# Altium PCB Camera.PcbDoc (part 1 of 2)
Units mm, origin at the board's own origin, x right, y up, seen from the top; angles counter-clockwise.
Board outline 24 x 24 mm, 8 copper layers (Top Layer, L2 - GND, L3 - SIG, L4 - PWR, L5 - GND, L6 - SIG, L7 - GND, Bottom Layer), stack 1.6 mm thick; 103 components, 49 nets, 348 pads, 185 vias.
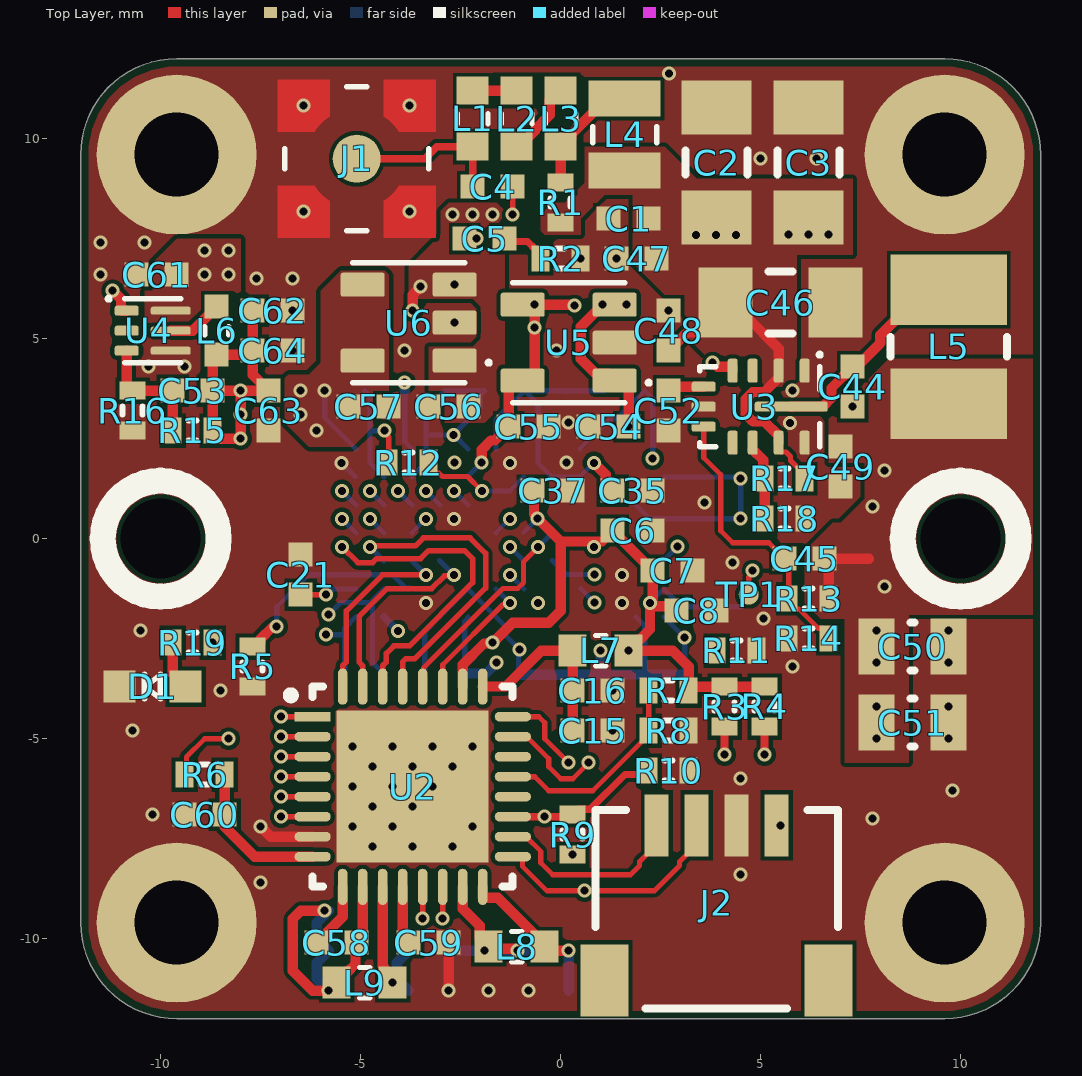
[diagram p0: Top Layer view]
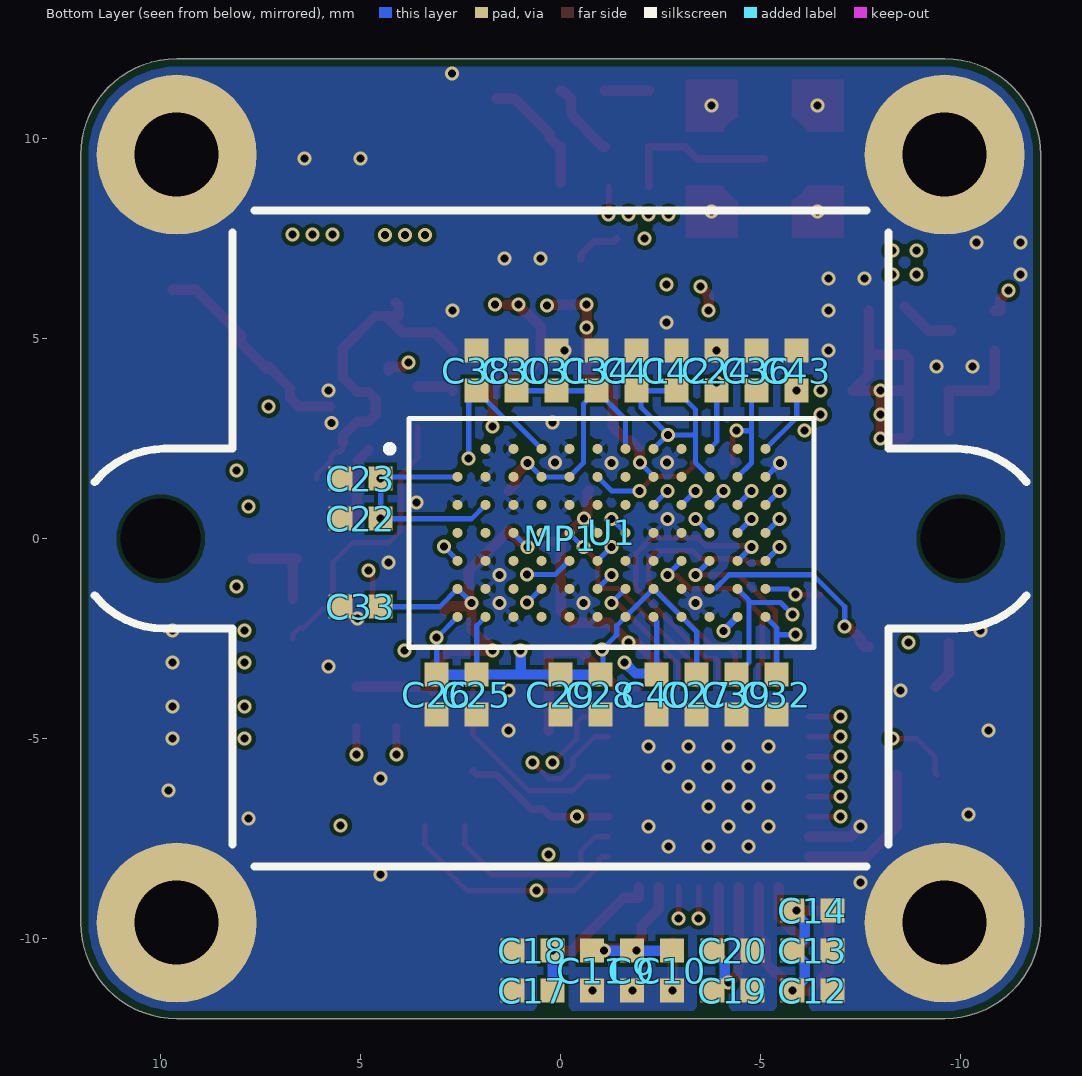
[diagram p1: Bottom Layer view, seen from below]
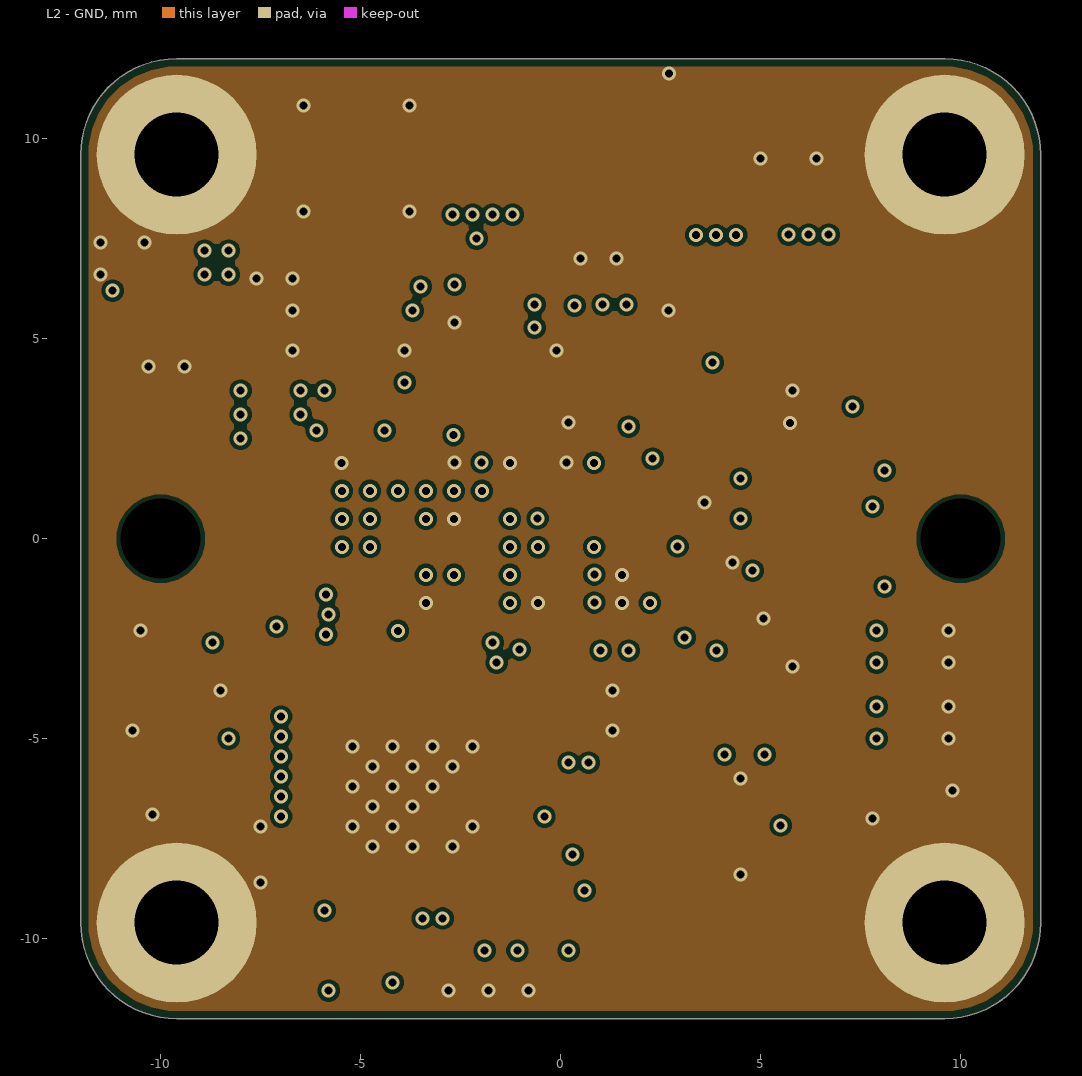
[diagram p2: L2 - GND]
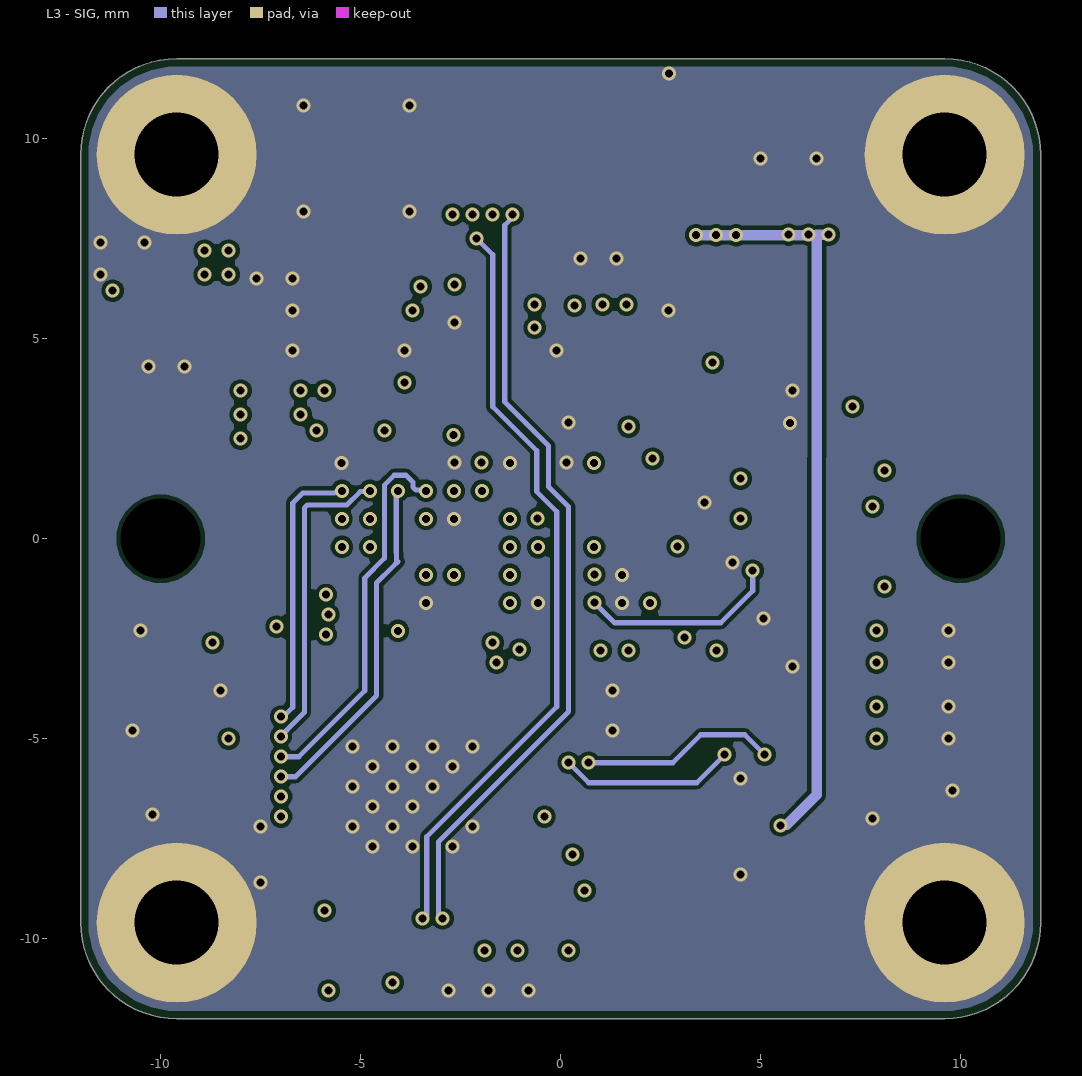
[diagram p3: L3 - SIG]
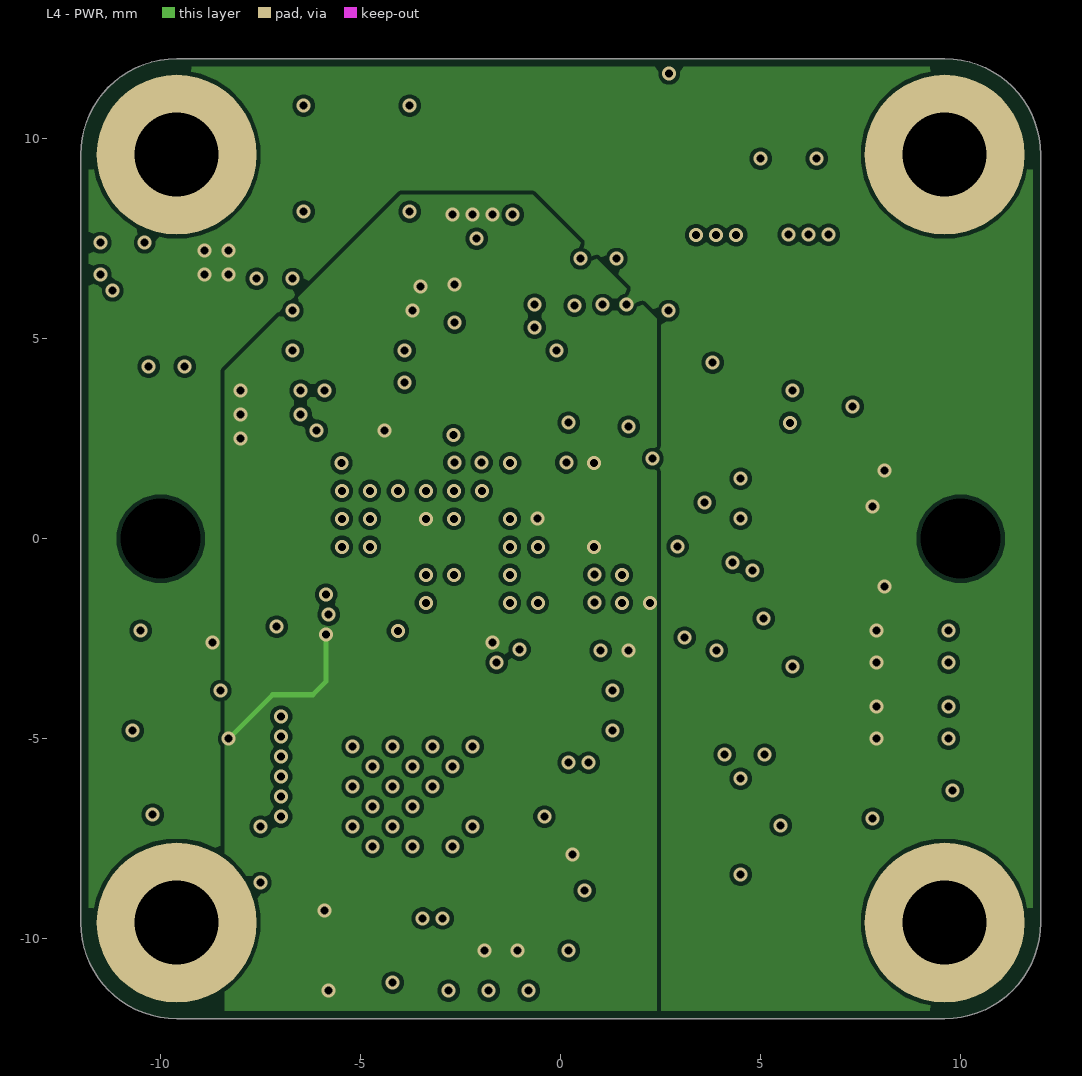
[diagram p4: L4 - PWR]
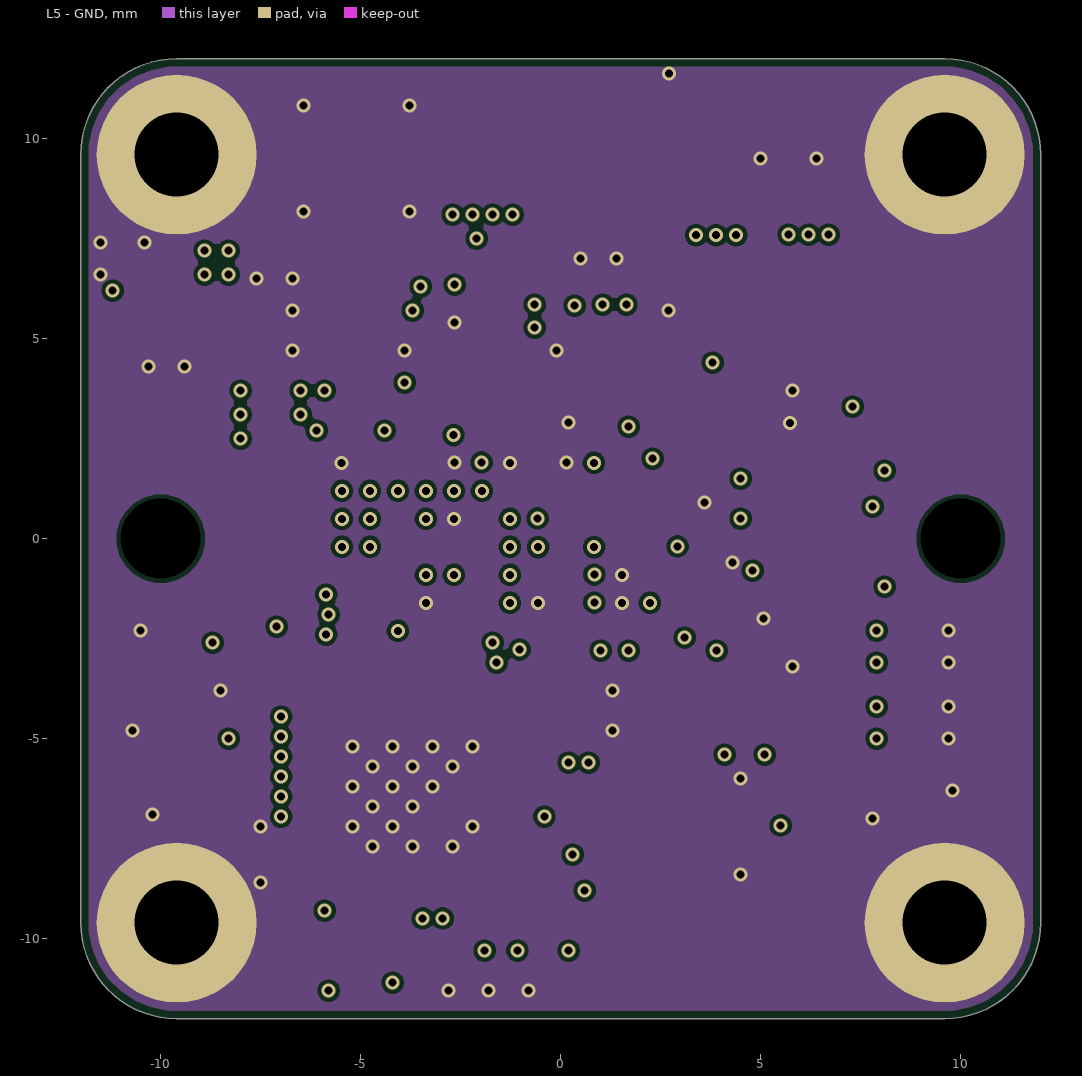
[diagram p5: L5 - GND]
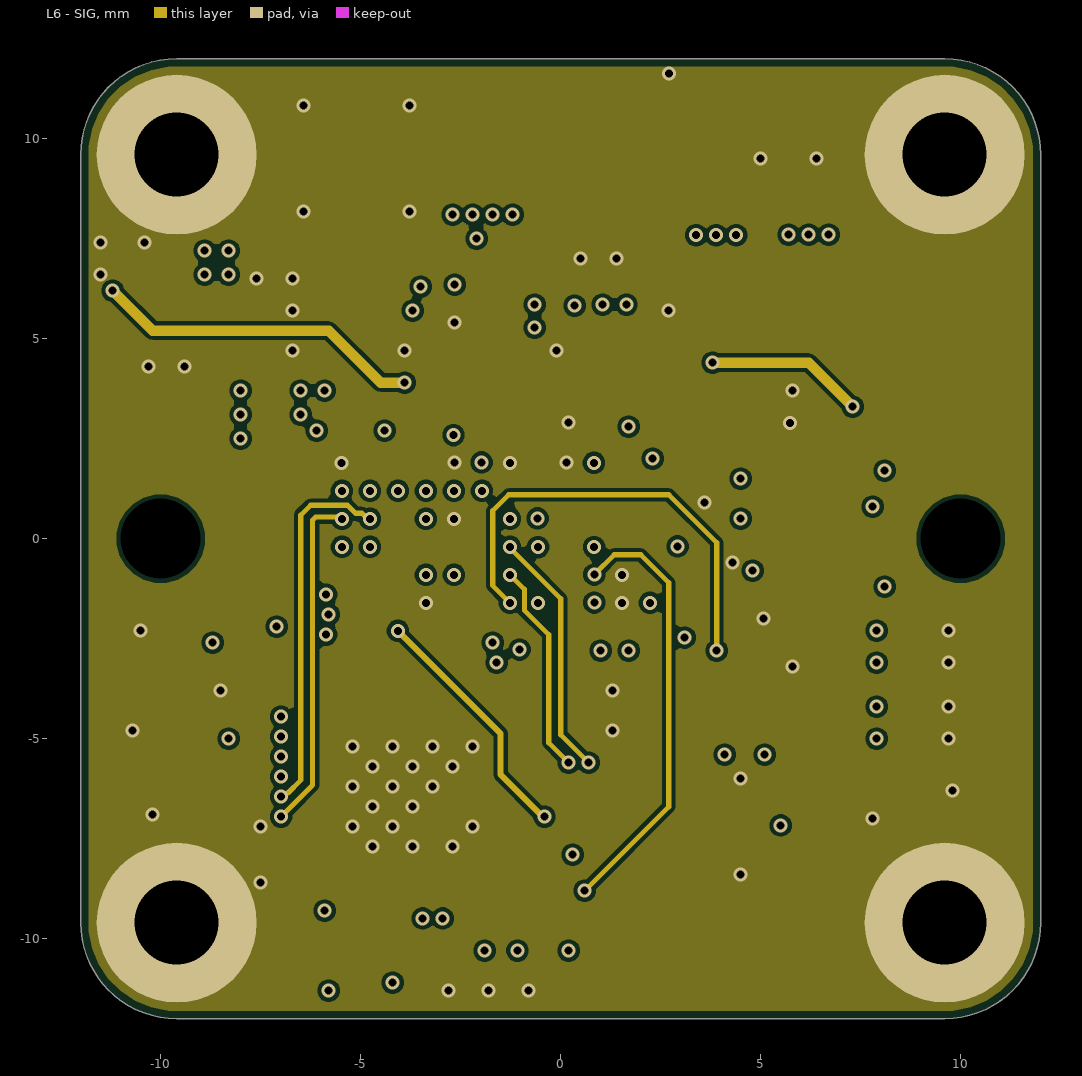
[diagram p6: L6 - SIG]
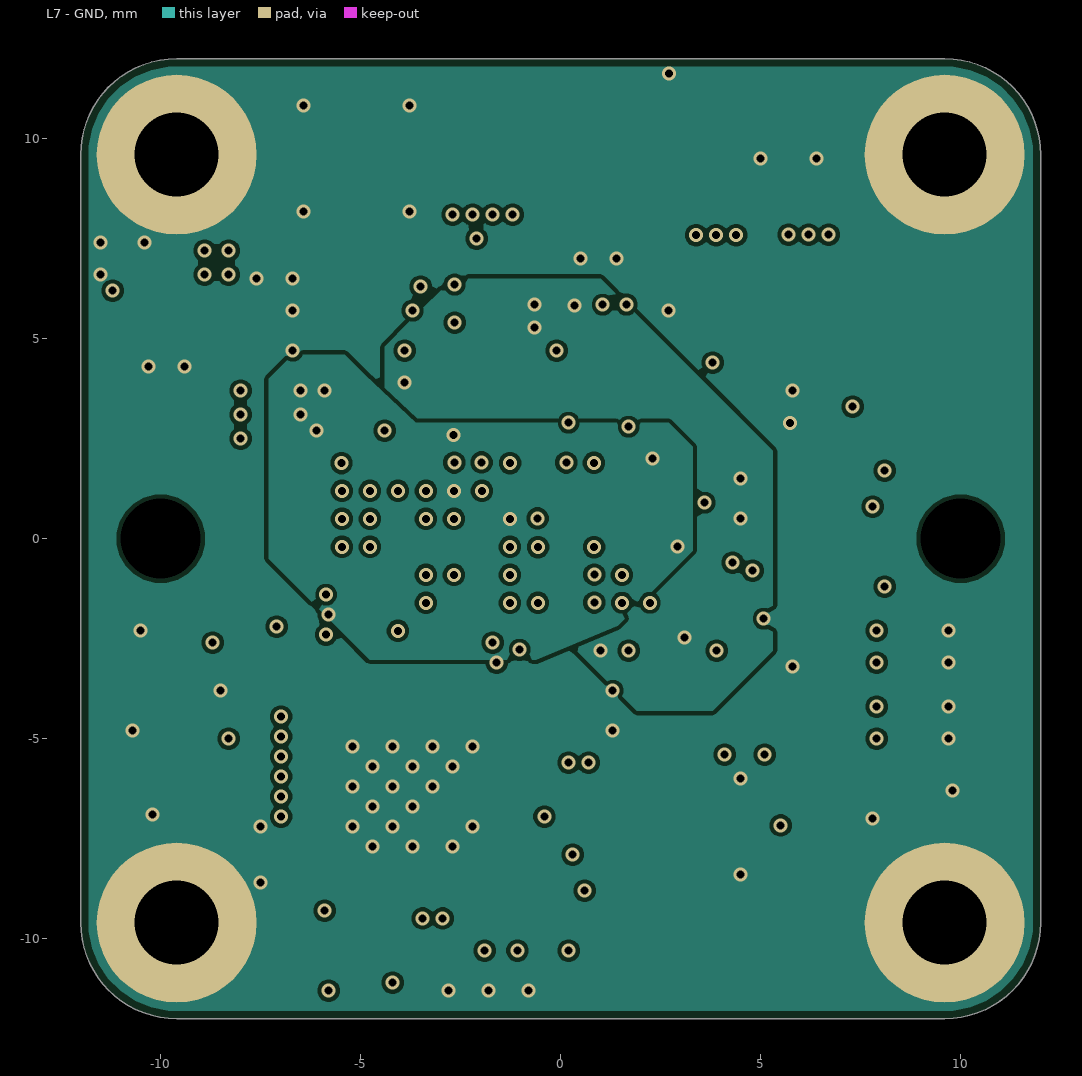
[diagram p7: L7 - GND]
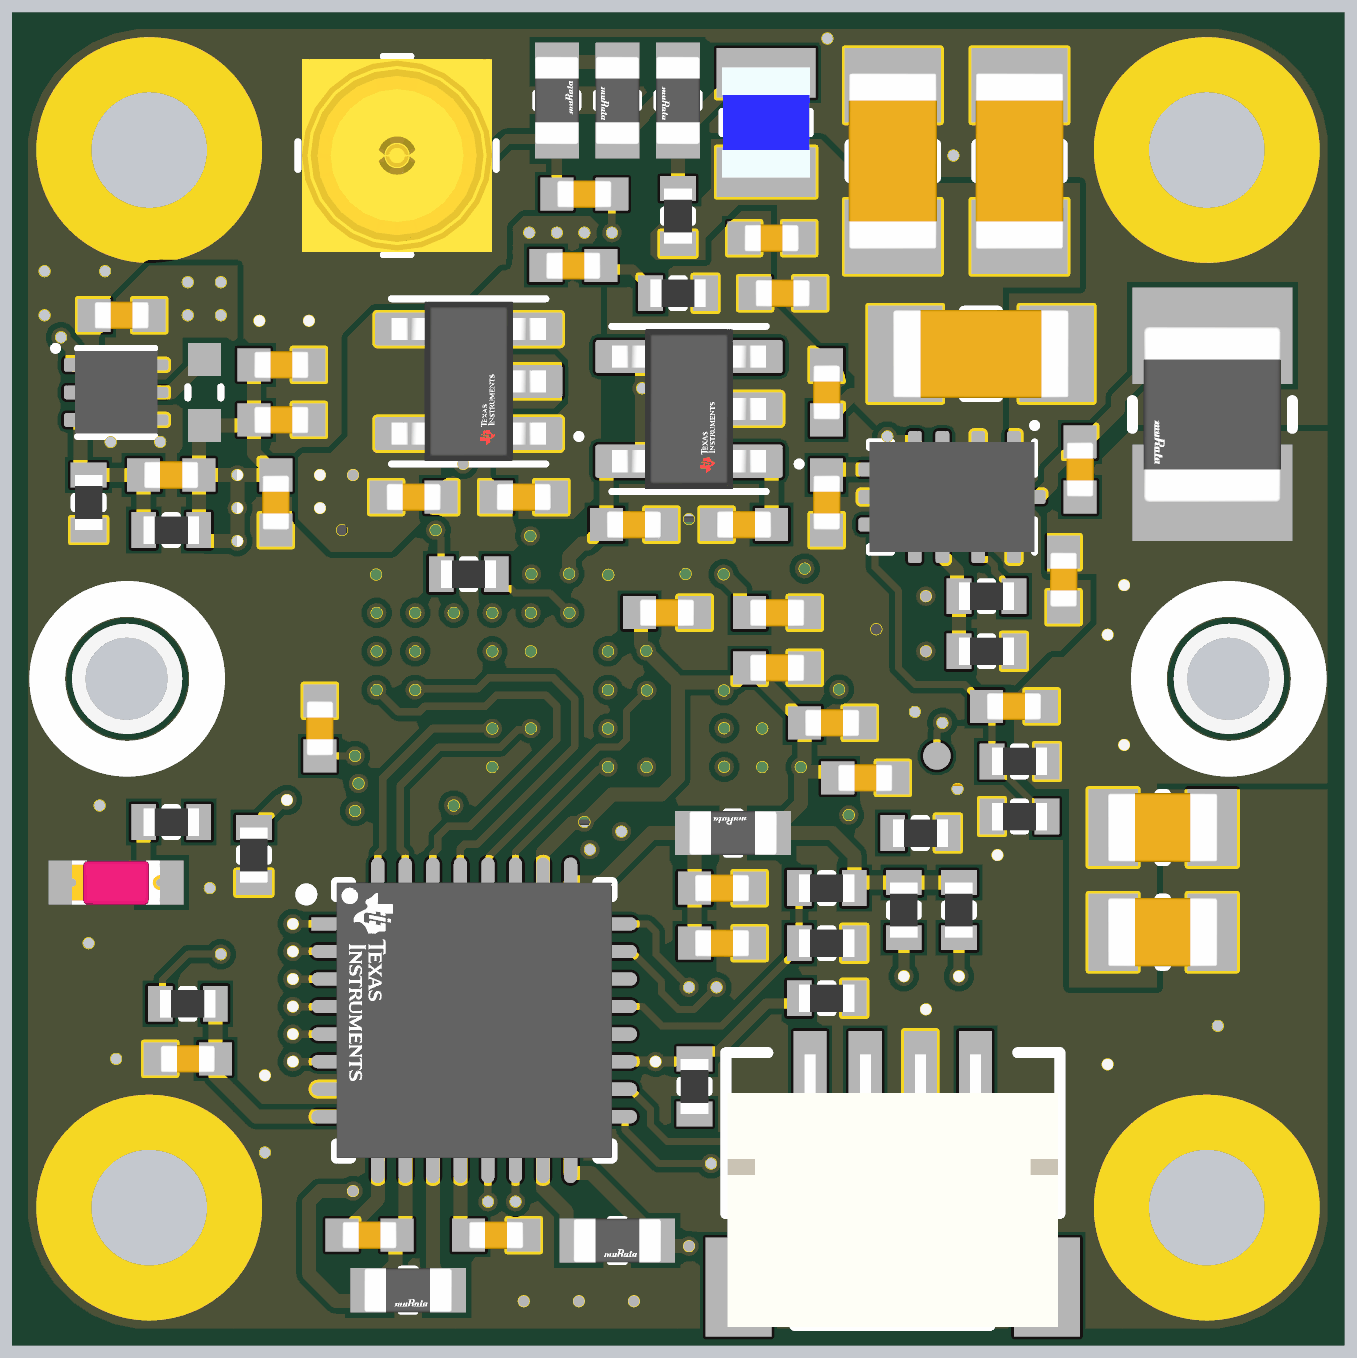
[diagram p9: 3D render of the assembled board from above, using the file's embedded part models]
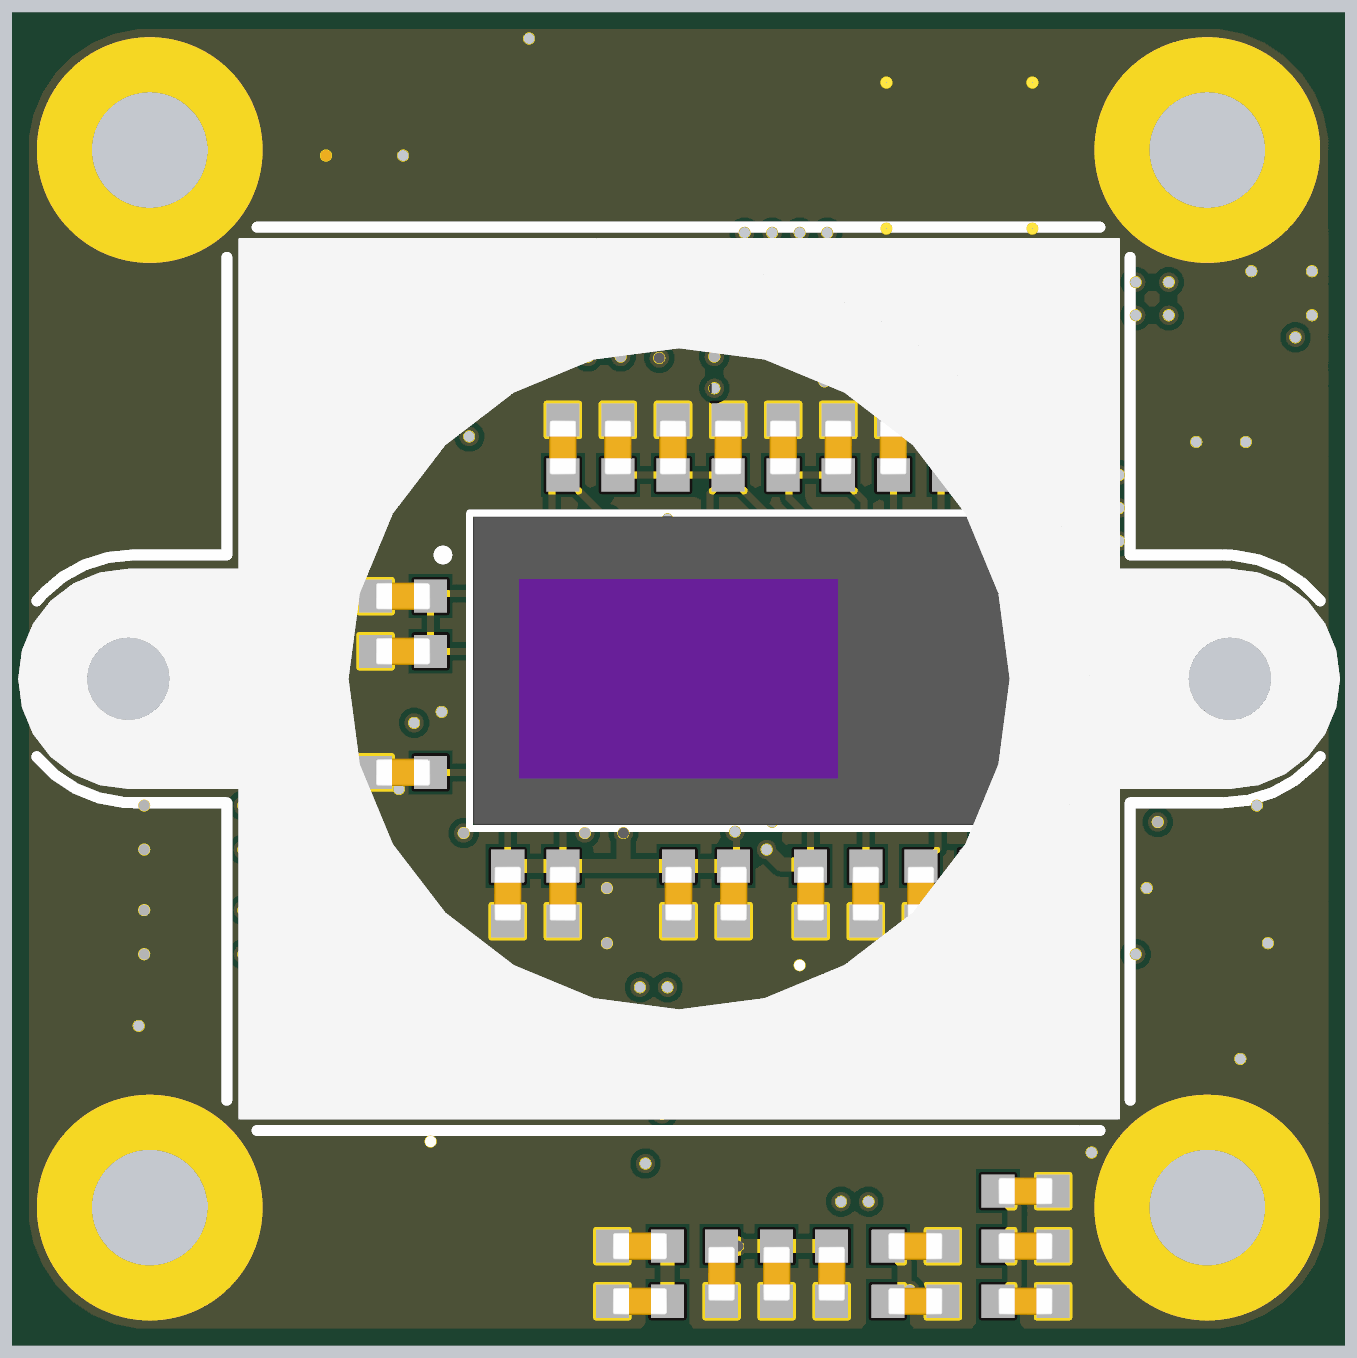
[diagram p10: 3D render of the assembled board from below, using the file's embedded part models]

## Layer stack, top to bottom
Top Solder: solder mask 0.015, SM-001, Dk 4
Top Layer: signal copper 0.035
Dielectric 1: prepreg 0.1164, PP-006, Dk 4.16
L2 - GND: signal copper 0.0152
Dielectric 2: core 0.3, PP-006, Dk 4.2
L3 - SIG: signal copper 0.0152
Dielectric 3: prepreg 0.0764, PP-006, Dk 3.91
Dielectric 4: prepreg 0.0764, PP-006, Dk 3.91
L4 - PWR: signal copper 0.0152
Dielectric 5: core 0.3, FR4_TG135_TG150_Dk4.3_Df0.02, Dk 4.2
L5 - GND: signal copper 0.0152
Dielectric 6: prepreg 0.0764, PP-006, Dk 3.91
Dielectric 7: prepreg 0.0764, PP-006, Dk 3.91
L6 - SIG: signal copper 0.0152
Dielectric 8: core 0.3, PP-006, Dk 4.2
L7 - GND: signal copper 0.0152
Dielectric 9: prepreg 0.1164, PP-006, Dk 4.16
Bottom Layer: signal copper 0.035
Bottom Solder: solder mask 0.015, SM-001, Dk 4

## Board outline
-12,-9.6 -12,9.6 cw(c-9.6,9.6) -9.6,12 9.6,12 cw(c9.6,9.6) 12,9.6 12,-9.6 cw(c9.6,-9.6) 9.6,-12 -9.6,-12 cw(c-9.6,-9.6)

## Design rules (kind name [scope] priority, off if disabled: settings)
AssemblyTestPointUsage [All] p1: isadvanced=TRUE
AssemblyTestpoint [All] p1: isadvanced=TRUE testpointundercomponent=TRUE minsize=1.016 maxsize=2.54 preferedsize=1.524 minholesize=0 maxholesize=1.016 preferedholesize=0.813 testpointgrid=0.025 usegrid=TRUE gridoriginx=166.25 gridoriginy=192.7 gridtolerance=0 allowsidetop=TRUE allowsidebottom=TRUE
BoardOutlineClearance BoardOutlineClearance_1 [All] p1: isadvanced=TRUE gap=0.2 ignorepadtopadclearanceinfootprint=FALSE
Clearance Clearance_1 [(ExistsOnLayer('L2 - GND') Or ExistsOnLayer('L3 - SIG') Or ExistsOnLayer('L4 - PWR') Or ExistsOnLayer('L5 - GND') Or ExistsOnLayer('L6 - SIG') Or ExistsOnLayer('L7 - GND')) vs (ExistsOnLayer('L2 - GND') Or ExistsOnLayer('L3 - SIG') Or ExistsOnLayer('L4 - PWR') Or ExistsOnLayer('L5 - GND') Or ExistsOnLayer('L6 - SIG') Or ExistsOnLayer('L7 - GND'))] p1: gap=0.1 ignorepadtopadclearanceinfootprint=FALSE sourcerule=48 cellrowname=All cellrowtype=0 cellcolname=All cellcoltype=0 innerlayers=TRUE
Clearance Clearance_2 [(ExistsOnLayer('Top Layer') Or ExistsOnLayer('Bottom Layer')) vs (ExistsOnLayer('Top Layer') Or ExistsOnLayer('Bottom Layer'))] p2: gap=0.1 ignorepadtopadclearanceinfootprint=FALSE sourcerule=48 cellrowname=All cellrowtype=0 cellcolname=All cellcoltype=0 outerlayers=TRUE
Clearance [All] p3: gap=0.254 ignorepadtopadclearanceinfootprint=FALSE ismatrix=TRUE
ComponentClearance ComponentClearance_LensHolder [InComponent('MP1')] p1: gap=-100 collisioncheckmode=3 verticalgap=-100 showdistances=FALSE
ComponentClearance [All] p2: isadvanced=TRUE gap=0.254 collisioncheckmode=3 verticalgap=0.254 showdistances=FALSE
DiffPairsRouting [All] p1: maxlimit=0.186 minlimit=0.17 mostfreqgap=0.218 toplayer_mingap=0.186 toplayer_prefgap=0.186 toplayer_minwidth=0.137 toplayer_maxwidth=0.137 toplayer_prefwidth=0.137 midlayer4_maxgap=0.17 midlayer4_prefgap=0.17 midlayer4_minwidth=0.128 midlayer4_maxwidth=0.128 midlayer4_prefwidth=0.128 midlayer5_maxgap=0.17 midlayer5_prefgap=0.17 midlayer5_minwidth=0.128 midlayer5_maxwidth=0.128 midlayer5_prefwidth=0.128 bottomlayer_mingap=0.186 bottomlayer_prefgap=0.186 bottomlayer_minwidth=0.137 bottomlayer_maxwidth=0.137 bottomlayer_prefwidth=0.137 impedanceprofiledriven=TRUE impedanceprofileid={404B1338-802D-463F-9344-648F71163B0D} impedanceprofilevalue=100.000000 maxuncoupledlength=7
FabricationTestPointUsage [All] p1: isadvanced=TRUE valid=0 allowmultiple=FALSE
FabricationTestpoint [All] p1: isadvanced=TRUE side=3 testpointundercomponent=TRUE minsize=1.016 maxsize=2.54 preferedsize=1.524 minholesize=0 maxholesize=1.016 preferedholesize=0.813 testpointgrid=0.025 allowsidetop=TRUE allowsidebottom=TRUE usegrid=TRUE gridoriginx=166.25 gridoriginy=192.7 gridtolerance=0
FanoutControl Fanout_BGA [IsBGA] p1: isadvanced=TRUE bgadir=Out bgaviamode=Centered fanoutstyle=Auto fanoutdirection=Alternating viagrid=0.025 // Fanout_BGA (Default Rule)
FanoutControl Fanout_LCC [IsLCC] p2: isadvanced=TRUE bgadir=Out bgaviamode=Centered fanoutstyle=Auto fanoutdirection=Alternating viagrid=0.025 // Fanout_LCC (Default Rule)
FanoutControl Fanout_SOIC [IsSOIC] p3: isadvanced=TRUE bgadir=Out bgaviamode=Centered fanoutstyle=Auto fanoutdirection=Alternating viagrid=0.025 // Fanout_SOIC (Default Rule)
FanoutControl Fanout_Small [(CompPinCount < 5)] p4: isadvanced=TRUE bgadir=Out bgaviamode=Centered fanoutstyle=Auto fanoutdirection=OutThenIn viagrid=0.025 // Fanout_Small (Default Rule)
FanoutControl Fanout_Default [All] p5: isadvanced=TRUE bgadir=Out bgaviamode=Centered fanoutstyle=Auto fanoutdirection=Alternating viagrid=0.025 // Fanout_Default (Default Rule)
Height [All] p1: isadvanced=TRUE minheight=0 maxheight=25.4 prefheight=12.7
HoleSize [All] p1: isadvanced=TRUE absolutevalues=TRUE maxlimit=5 minlimit=0.2 maxpercent=80.000 minpercent=20.000
HoleToHoleClearance [All] p1: isadvanced=TRUE gap=0.254 allowstackedmicrovias=TRUE
LayerPairs [All] p1: isadvanced=TRUE enforce=TRUE
MinimumSolderMaskSliver [All] p1: isadvanced=TRUE minsoldermaskwidth=0.1
NetAntennae [All] p1: isadvanced=TRUE netantennaetolerance=0
PasteMaskExpansion [All] p1: isadvanced=TRUE expansion=0
PlaneClearance [All] p1: isadvanced=TRUE clearance=0.254
PlaneConnect [All] p1: isadvanced=TRUE pad.planeconnectstyle=Relief pad.reliefexpansion=0.508 pad.reliefentries=4 pad.reliefconductorwidth=0.254 pad.reliefairgap=0.254 via.planeconnectstyle=Direct via.reliefexpansion=0.508 via.reliefentries=4 via.reliefconductorwidth=0.254 via.reliefairgap=0.254
PolygonConnect PolygonConnect_camera [All vs InComponent('U1')] p1: connectstyle=Relief reliefconductorwidth=0.127 reliefentries=4 polygonreliefangle="45 Angle" airgapwidth=0.127
PolygonConnect PolygonConnectStyle_Direct [IsNamedPolygon('PolygonDirect')] p2: isadvanced=TRUE connectstyle=Direct reliefconductorwidth=0.254 reliefentries=2 polygonreliefangle="0 Angle" airgapwidth=0.254
PolygonConnect [All] p3: connectstyle=Direct reliefconductorwidth=0.127 reliefentries=4 polygonreliefangle="90 Angle" airgapwidth=0.127
RoutingCorners [All] p1: isadvanced=TRUE cornerstyle=45-Degree minsetback=2.54 maxsetback=2.54
RoutingPriority [All] p1: isadvanced=TRUE routingpriority=0
RoutingVias [All] p1: holewidth=0.3 width=0.45 viastyle="Through Hole" minholewidth=0.2 minwidth=0.35 maxholewidth=0.45 maxwidth=0.6
ShortCircuit [All] p1: isadvanced=TRUE allowed=FALSE
SilkToSilkClearance [All] p1: isadvanced=TRUE silktosilkclearance=0.127
SilkToSolderMaskClearance [IsPad] p1: isadvanced=TRUE minsilkscreentomaskgap=0.127 clearancetoexposedcopper=TRUE
SolderMaskExpansion SolderMaskExpansion_via [IsVia] p1: isadvanced=TRUE expansion=0.102 istentingtop=TRUE useseparateexpansions=TRUE expansionbottom=0.102 istentingbottom=TRUE
SolderMaskExpansion [All] p2: isadvanced=TRUE expansion=0.05 istentingtop=FALSE
SupplyNets "Schematic Supply Nets_2" [InNet('24V_VPOC')] p1: voltage=0.000
SupplyNets "Schematic Supply Nets_6" [InNet('3V3')] p2: voltage=0.000
SupplyNets "Schematic Supply Nets_5" [InNet('2V8')] p3: voltage=0.000
SupplyNets "Schematic Supply Nets_4" [InNet('1V2')] p4: voltage=0.000
SupplyNets "Schematic Supply Nets_3" [InNet('1V8')] p5: voltage=0.000
SupplyNets "Schematic Supply Nets" [InNet('GND')] p6: voltage=0.000
UnRoutedNet [All] p1: isadvanced=TRUE
UnpouredPolygon [All] p1: isadvanced=TRUE
Width Width_S50 [InNetClass('S50')] p1: maxlimit=0.254 minlimit=0.151 preferedwidth=0.254 toplayer_minwidth=0.185 toplayer_maxwidth=0.185 toplayer_prefwidth=0.185 midlayer4_maxwidth=0.151 midlayer4_prefwidth=0.151 midlayer5_maxwidth=0.151 midlayer5_prefwidth=0.151 bottomlayer_minwidth=0.185 bottomlayer_maxwidth=0.185 bottomlayer_prefwidth=0.185 impedanceprofiledriven=TRUE impedanceprofileid={3F91AD93-88F6-4B24-B47E-161A5E0962E3} impedanceprofilevalue=50.000000 minimp=50.000000 maximp=50.000000 favimp=50.000000
Width [All] p2: maxlimit=0.254 minlimit=0.127 preferedwidth=0.254
3 further rules are at their usual default settings.

## Classes and differential pairs
component class Top: C1 C2 C3 C4 C5 J1 J2 L1 L2 L3 L4 MP1 R1 R2
component class U_serializer: C6 C7 C8 C9 C10 C11 C12 C13 C14 C15 C16 C17 C18 C19 C20 C58 C59 C60 L7 L8 L9 R3 R4 R6 R7 R8 R9 R10 U2
net class S50: CLK FPD_DATA FPD_DOUT_C_N
component class U_Power: C44 C45 C46 C47 C48 C49 C50 C51 C52 C53 C54 C55 C56 C57 C61 C62 C63 C64 D1 L5 L6 R13 R14 R15 R16 R17 R18 R19 U3 U4 U5 U6
component class U_camera: 2 C21 C22 C23 C24 C25 C26 C27 C28 C29 C30 C31 C32 C33 C34 C35 C36 C37 C38 C39 C40 C41 C42 C43 R5 R11 R12 TP1 U1
differential pair FPD: +FPD_P -FPD_N
differential pair MIPI.D3: +MIPI.D3_P -MIPI.D3_N
differential pair MIPI.D2: +MIPI.D2_P -MIPI.D2_N
differential pair MIPI.D1: +MIPI.D1_P -MIPI.D1_N
differential pair MIPI.D0: +MIPI.D0_P -MIPI.D0_N
differential pair MIPI.CLK: +MIPI.CLK_P -MIPI.CLK_N

## Components (designator, comment, footprint, x,y, rotation, side; value= is the part's Value field where it differs from the comment)
C1 "GRT155R71H104KE01D" "Generic 0402 capacitor" 1.7,8 r0 top value=100nF
C2 "CL31A106MBHNNNE" "Generic 1206 Capacitor" 3.9,9.4 r270 top value=10µF
C3 "CL31A106MBHNNNE" "Generic 1206 Capacitor" 6.2,9.4 r270 top value=10µF
C4 "GRM155R71H473KE14D" "Generic 0402 capacitor" -1.7,8.8 r180 top value=47nF
C5 "GRM155R71H473KE14D" "Generic 0402 capacitor" -1.9,7.5 r0 top value=47nF
C6 "GRT155C80J106ME13J" "Generic 0402 capacitor" 1.8,0.2 r180 top value=10µF
C7 "GRT155R71H104KE01D" "Generic 0402 capacitor" 2.8,-0.8 r180 top value=100nF
C8 "GCM155R72A472KA37D" "Generic 0402 capacitor" 3.4,-1.8 r180 top value=4.7nF
C9 "GRT155C80J106ME13J" "Generic 0402 capacitor" -1.781,-10.8 r90 bottom value=10µF
C10 "GRT155R71H104KE01D" "Generic 0402 capacitor" -2.781,-10.8 r90 bottom value=100nF
C11 "GCM155R72A472KA37D" "Generic 0402 capacitor" -0.781,-10.8 r90 bottom value=4.7nF
C12 "GRT155C80J106ME13J" "Generic 0402 capacitor" -6.3,-11.3 r0 bottom value=10µF
C13 "GRT155R71H104KE01D" "Generic 0402 capacitor" -6.3,-10.3 r0 bottom value=100nF
C14 "GCM155R72A472KA37D" "Generic 0402 capacitor" -6.3,-9.3 r0 bottom value=4.7nF
C15 "MAASL105CD7105MFCA01" "Generic 0402 capacitor" 0.8,-4.8 r180 top value=1µF
C16 "GCM155R72A472KA37D" "Generic 0402 capacitor" 0.8,-3.8 r180 top value=4.7nF
C17 "MAASL105CD7105MFCA01" "Generic 0402 capacitor" 0.7,-11.3 r180 bottom value=1µF
C18 "GCM155R72A472KA37D" "Generic 0402 capacitor" 0.7,-10.3 r180 bottom value=4.7nF
C19 "MAASL105CD7105MFCA01" "Generic 0402 capacitor" -4.3,-11.3 r0 bottom value=1µF
C20 "GCM155R72A472KA37D" "Generic 0402 capacitor" -4.3,-10.3 r0 bottom value=4.7nF
C21 "MAASL105CD7105MFCA01" "Generic 0402 capacitor" -6.5,-0.9 r270 top value=1µF
C22 "GRT155R71H104KE01D" "Generic 0402 capacitor" 5,0.5 r180 bottom value=100nF
C23 "GRT155R71H104KE01D" "Generic 0402 capacitor" 5,1.5 r180 bottom value=100nF
C24 "GRT155R71H104KE01D" "Generic 0402 capacitor" -3.9,4.2 r270 bottom value=100nF
C25 "GRT155R71H104KE01D" "Generic 0402 capacitor" 2.1,-3.9 r90 bottom value=100nF
C26 "GRT155R71H104KE01D" "Generic 0402 capacitor" 3.1,-3.9 r90 bottom value=100nF
C27 "GRT155R71H104KE01D" "Generic 0402 capacitor" -3.4,-3.9 r90 bottom value=100nF
C28 "GRT155R71H104KE01D" "Generic 0402 capacitor" -1,-3.9 r90 bottom value=100nF
C29 "GRT155R71H104KE01D" "Generic 0402 capacitor" 0,-3.9 r90 bottom value=100nF
C30 "GRT155R71H104KE01D" "Generic 0402 capacitor" 1.1,4.2 r270 bottom value=100nF
C31 "GRT155R71H104KE01D" "Generic 0402 capacitor" 0.1,4.2 r270 bottom value=100nF
C32 "GRT155R71H104KE01D" "Generic 0402 capacitor" -5.4,-3.9 r90 bottom value=100nF
C33 "GRT155R71H104KE01D" "Generic 0402 capacitor" 5,-1.7 r180 bottom value=100nF
C34 "GRT155R71H104KE01D" "Generic 0402 capacitor" -0.9,4.2 r270 bottom value=100nF
C35 "GRT155R71H104KE01D" "Generic 0402 capacitor" 1.8,1.2 r180 top value=100nF
C36 "GRT155R71H104KE01D" "Generic 0402 capacitor" -4.9,4.2 r270 bottom value=100nF
C37 "GRT155R71H104KE01D" "Generic 0402 capacitor" -0.2,1.2 r180 top value=100nF
C38 "GRT155R71H104KE01D" "Generic 0402 capacitor" 2.1,4.2 r270 bottom value=100nF
C39 "GRT155R71H104KE01D" "Generic 0402 capacitor" -4.4,-3.9 r90 bottom value=100nF
C40 "GRT155R71H104KE01D" "Generic 0402 capacitor" -2.4,-3.9 r90 bottom value=100nF
C41 "GRT155R71H104KE01D" "Generic 0402 capacitor" -1.9,4.2 r270 bottom value=100nF
C42 "GRT155R71H104KE01D" "Generic 0402 capacitor" -2.9,4.2 r270 bottom value=100nF
C43 "GRT155R71H104KE01D" "Generic 0402 capacitor" -5.9,4.2 r270 bottom value=100nF
C44 "GRT155R71H104KE01D" "Generic 0402 capacitor" 7.3,3.8 r90 top value=100nF
C45 "GRT1555C1E120JA02J" "Generic 0402 capacitor" 6.1,-0.5 r180 top value=12pF
C46 "CL31A106MBHNNNE" "Generic 1206 Capacitor" 5.5,5.9 r180 top value=10µF
C47 "GRT155R71H104KE01D" "Generic 0402 capacitor" 1.9,7 r180 top value=100nF
C48 "GRT155R71H104KE01D" "Generic 0402 capacitor" 2.7,5.2 r90 top value=100nF
C49 "GRT155R71H104KE01D" "Generic 0402 capacitor" 7,1.8 r270 top value=100nF
C50 "GRT21BD71A226ME13L" "Generic 0805 Cap" 8.8,-2.7 r180 top value=22µF
C51 "GRT21BD71A226ME13L" "Generic 0805 Cap" 8.8,-4.6 r180 top value=22µF
C52 "MAASL105CD7105MFCA01" "Generic 0402 capacitor" 2.7,3.2 r90 top value=1µF
C53 "GCM155R72A102KA37J" "Generic 0402 capacitor" -9.2,3.7 r0 top value=1nF
C54 "MAASL105CD7105MFCA01" "Generic 0402 capacitor" 1.2,2.8 r0 top value=1µF
C55 "MAASL105CD7105MFCA01" "Generic 0402 capacitor" -0.8,2.8 r180 top value=1µF
C56 "MAASL105CD7105MFCA01" "Generic 0402 capacitor" -2.8,3.3 r0 top value=1µF
C57 "MAASL105CD7105MFCA01" "Generic 0402 capacitor" -4.8,3.3 r180 top value=1µF
C58 "GRT155R71H104KE01D" "Generic 0402 capacitor" -5.6,-10.1 r0 top value=100nF
C59 "GRT155R71H104KE01D" "Generic 0402 capacitor" -3.3,-10.1 r0 top value=100nF
C60 "GRT155R71H104KE01D" "Generic 0402 capacitor" -8.9,-6.9 r180 top value=100nF
C61 "GRT155R61A475ME13D" "Generic 0402 capacitor" -10.1,6.6 r180 top value=4.7µF
C62 "GRT155R71H104KE01D" "Generic 0402 capacitor" -7.2,5.7 r0 top value=100nF
C63 "GRT155C80J106ME13J" "Generic 0402 capacitor" -7.3,3.2 r90 top value=10µF
C64 "GRT155C80J106ME13J" "Generic 0402 capacitor" -7.2,4.7 r180 top value=10µF
D1 "SML-D12V8WT86C" FP-SML-D12-MFG -10.2,-3.7 r0 top
J1 "MMCX-J-P-H-ST-SM1" MMCX-J-P-H-ST-SM1 -5.1,9.5 r0 top
J2 "SM04B-SRSS-TB(LF)(SN)" "JST SM04B-SRSS-TB" 3.9,-9.2 r180 top
L1 "BLM18HE152SN1D" 0603_1.6x0.8x0.8mm_IND#1 -2.2,10.5 r90 top
L2 "BLM18HE152SN1D" 0603_1.6x0.8x0.8mm_IND#1 -1.1,10.5 r270 top
L3 "BLM18HE152SN1D" 0603_1.6x0.8x0.8mm_IND#1 0,10.5 r270 top
L4 "BRC2016T100K" 0805_2.0x1.6x1.6mm_IND 1.6,10.1 r270 top value=10µH
L5 "DFE322520FD-4R7M=P2" FP-DFE322520F_D-IPC_A 9.7,4.8 r270 top value=4.7µH
L6 "ASMPH-0603-R47M-T" 0603_1.6x0.8x0.8mm_IND#2 -8.6,5.2 r270 top value=470nH
L7 "BLM18HE152SN1D" 0603_1.6x0.8x0.8mm_IND#1 1,-2.8 r180 top
L8 "BLM18HE152SN1D" 0603_1.6x0.8x0.8mm_IND#1 -1.1,-10.2 r0 top
L9 "BLM18HE152SN1D" 0603_1.6x0.8x0.8mm_IND#1 -4.9,-11.1 r0 top
MP1 "CLA020-PC" M12_lens_holder_20mm 0,0 r0 bottom
R1 "RCA04024K02FKEDSR" "Generic 0402 Resistor" 0,8.4 r270 top value=4.02k
R2 "RMCA0402FT49R9-HP" "Generic 0402 Resistor" 0,7 r180 top value=49.9
R3 "RMCF0402JT1K50" "Generic 0402 Resistor" 4.1,-4.2 r90 top value=1.5k
R4 "RMCF0402JT1K50" "Generic 0402 Resistor" 5.1,-4.2 r90 top value=1.5k
R5 "RMCF0402JT1K50" "Generic 0402 Resistor" -7.7,-3.2 r270 top value=1.5k
R6 "RNCP0402FTD10K0" "Generic 0402 Resistor" -8.9,-5.9 r180 top value=10k
R7 "RNCP0402FTD10K0" "Generic 0402 Resistor" 2.7,-3.8 r180 top value=10k
R8 "RNCP0402FTD10K0" "Generic 0402 Resistor" 2.7,-4.8 r0 top value=10k
R9 "AC0402FR-0736KL" "Generic 0402 Resistor" 0.3,-7.4 r270 top value=36k
R10 "AC0402FR-0736KL" "Generic 0402 Resistor" 2.7,-5.8 r180 top value=36k
R11 "RNCP0402FTD10K0" "Generic 0402 Resistor" 4.4,-2.8 r180 top value=10k
R12 "RNCP0402FTD10K0" "Generic 0402 Resistor" -3.8,1.9 r180 top value=10k
R13 "WR04X1003FTL" "Generic 0402 Resistor" 6.2,-1.5 r180 top value=100k
R14 "CR0402-FX-4322GLF" "Generic 0402 Resistor" 6.2,-2.5 r0 top value=43.2k
R15 "WR04X1003FTL" "Generic 0402 Resistor" -9.2,2.7 r0 top value=100k
R16 "560112110041" "Generic 0402 Resistor" -10.7,3.2 r90 top value=200k
R17 "WR04X1003FTL" "Generic 0402 Resistor" 5.6,1.5 r0 top value=100k
R18 "RNCP0402FTD10K0" "Generic 0402 Resistor" 5.6,0.5 r180 top value=10k
R19 "RMCF0402FT330R" "Generic 0402 Resistor" -9.2,-2.6 r180 top value=330
TP1 "TP 0.5mm" "TP 0.5mm" 4.7,-1.4 r0 top
U1 "AR0234CSSM00SUKA0-CP" 83-VFBGA -1.271,0.148 r180 bottom locked
U2 "DS90UB953TRHBTQ1" VQFN-32_5x5x1.0mm_P0.5mm -3.7,-6.2 r0 top
U3 "LMR36015SFBRNXR" VQFN_HR-12_3x2x1.0mm_P0.5mm 4.975,3.3 r270 top
U4 "TPS62824DMQR" VSON_HR-6_1.5x1.5x1.0mm_P0.5mm -10.2,5.2 r0 top
U5 "TPS7A2028PDBVR" SOT23-3_3x5x1.1mm_P0.95mm 0.2,4.9 r180 top
U6 "TLV75512PDBVR" SOT23-3_3x5x1.1mm_P0.95mm -3.8,5.4 r180 top

## Footprints (in the part's own frame and the unit in brackets; to place one, negate y for a bottom-side part, rotate by r counter-clockwise, add the part's x,y. Pads: shape width x height; smd on the part's side, far side on the other; paste and mask are expansions set on the pad)
83-VFBGA [mm] "AR0234CSSM00SUKA0-CP"
  round 0.25 smd: A2(-3.15,2.1) A3(-2.45,2.1) A4(-1.75,2.1) A5(-1.05,2.1) A6(-0.35,2.1) A7(0.35,2.1) A8(1.05,2.1) A9(1.75,2.1) A10(2.45,2.1) A11(3.15,2.1) A12(3.85,2.1) B1(-3.85,1.4) B2(-3.15,1.4) B3(-2.45,1.4) B4(-1.75,1.4) B5(-1.05,1.4) B6(-0.35,1.4) B7(0.35,1.4) B8(1.05,1.4) B9(1.75,1.4) B10(2.45,1.4) B11(3.15,1.4) B12(3.85,1.4) C1(-3.85,0.7) C2(-3.15,0.7) C3(-2.45,0.7) C4(-1.75,0.7) C5(-1.05,0.7) C6(-0.35,0.7) C7(0.35,0.7) C8(1.05,0.7) C9(1.75,0.7) C10(2.45,0.7) C11(3.15,0.7) C12(3.85,0.7) D1(-3.85,0) D2(-3.15,0) D3(-2.45,0) D4(-1.75,0) D5(-1.05,0) D6(-0.35,0) D7(0.35,0) D8(1.05,0) D9(1.75,0) D10(2.45,0) D11(3.15,0) D12(3.85,0) E1(-3.85,-0.7) E2(-3.15,-0.7) E3(-2.45,-0.7) E4(-1.75,-0.7) E5(-1.05,-0.7) E6(-0.35,-0.7) E7(0.35,-0.7) E8(1.05,-0.7) E9(1.75,-0.7) E10(2.45,-0.7) E11(3.15,-0.7) E12(3.85,-0.7) F1(-3.85,-1.4) F2(-3.15,-1.4) F3(-2.45,-1.4) F4(-1.75,-1.4) F5(-1.05,-1.4) F6(-0.35,-1.4) F7(0.35,-1.4) F8(1.05,-1.4) F9(1.75,-1.4) F10(2.45,-1.4) F11(3.15,-1.4) F12(3.85,-1.4) G1(-3.85,-2.1) G2(-3.15,-2.1) G3(-2.45,-2.1) G4(-1.75,-2.1) G5(-1.05,-2.1) G6(-0.35,-2.1) G7(0.35,-2.1) G8(1.05,-2.1) G9(1.75,-2.1) G10(2.45,-2.1) G11(3.15,-2.1) G12(3.85,-2.1)
  silkscreen extent -5.62,-2.86 5.06,2.86, body extent -5,-2.8 5,2.8, height 0.76
0603_1.6x0.8x0.8mm_IND#1 [mm] "BLM18HE152SN1D"
  rect 0.7x0.8 smd paste+0 mask+0: 1(-0.7,0) 2(0.7,0)
  silkscreen extent -0.13,-0.38 0.13,0.38, body extent -0.8,-0.4 0.8,0.4, height 0.95
0603_1.6x0.8x0.8mm_IND#2 [mm] "Abracon 0603 inductor"
  rect 0.6x0.6 smd paste+0 mask+0: 1(-0.6,0) 2(0.6,0)
  silkscreen extent -0.1,-0.3 0.1,0.3, body extent -0.8,-0.4 0.8,0.4, height 0.8
0805_2.0x1.6x1.6mm_IND [mm] "BRC2016T100K inductor"
  rect 0.9x1.8 smd: 1(-0.9,0) 2(0.9,0)
  silkscreen extent -0.2,-0.8 0.2,0.8, body extent -1,-0.8 1,0.8, height 1.8
FP-DFE322520F_D-IPC_A [mm] "Cyntech 0805 inductor"
  rect 1.753x2.904 smd paste+0 mask+0: 1(-1.425,0) 2(1.425,0)
  silkscreen extent -0.25,-1.45 0.25,1.45, body extent -2.8,-1.95 2.8,1.95, height 0.25
FP-SML-D12-MFG [mm]
  rect 0.8x0.8 smd paste+0 mask+0: 1(-0.825,0) 2(0.825,0)
  silkscreen extent -0.2,-0.3 0.2,0.3, body extent -1.33,-0.55 1.33,0.55, height 0.25
"Generic 0402 capacitor" [mm] "Generic 0402 capacitor"
  rect 0.6x0.6 smd: 1(-0.5,0) 2(0.5,0)
  body extent -0.5,-0.25 0.5,0.25, height 0.5
"Generic 0402 Resistor" [mm]
  rect 0.45x0.65 smd: 1(-0.5,0) 2(0.5,0)
  silkscreen extent -0.1,-0.25 0.1,0.25, body extent -0.5,-0.25 0.5,0.25, height 0.35
"Generic 0805 Cap" [mm] "Chip Capacitor, 2-Leads, Body 2.00x1.25mm, IPC Medium Density"
  rect 0.9x1.4 smd: 1(-0.9,0) 2(0.9,0)
  silkscreen extent -0.05,-0.6 0.05,0.6, body extent -1,-0.63 1,0.63, height 0.9
"Generic 1206 Capacitor" [mm] "Chip Capacitor, 2-Leads, Body 3.20x1.60mm, IPC Medium Density"
  rect 1.35x1.75 smd: 1(-1.375,0) 2(1.375,0)
  silkscreen extent -0.3,-0.77 0.3,0.77, body extent -1.6,-0.8 1.6,0.8, height 1.6
"JST SM04B-SRSS-TB" [mm] "1.0mm pitch/Disconnectable Crimp style connector"
  rect 0.6x1.55 smd: 1(-1.5,-2.032) 2(-0.5,-2.032) 3(0.5,-2.032) 4(1.5,-2.032)
  rect 1.2x1.8 smd: M(-2.8,1.843) M(2.8,1.843)
  silkscreen extent -3.03,-2.41 3.03,2.54, body extent -3,-2.38 3,2.57, height 2.95
M12_lens_holder_20mm [mm]
  round 0 hole 2 unplated: H1(-10,0) H2(10,0)
  silkscreen extent -11.65,-8.2 11.65,8.2, body extent -12,-8 11.98,8, height 10.07
MMCX-J-P-H-ST-SM1 [mm]
  round 1.2 smd: 1(0,0)
  round 0.025 smd: S1(-1.325,1.325) S2(1.325,1.325) S3(1.325,-1.325) S4(-1.325,-1.325)
  silkscreen extent -1.8,-1.8 1.8,1.8, body extent -1.73,-1.75 1.73,1.75, height 5
SOT23-3_3x5x1.1mm_P0.95mm [mm] "TI SOT-23-5"
  rrect16% 1.1x0.6 smd: 1(-1.15,0.95) 2(-1.15,0) 3(-1.15,-0.95) 4(1.15,-0.95) 5(1.15,0.95)
  silkscreen extent -2.05,-1.5 1.4,1.5, body extent -2.55,-1.95 2.55,1.95, height 0.25
"TP 0.5mm" [mm]
  round 0.5 smd: 1(0,0)
VQFN-32_5x5x1.0mm_P0.5mm [mm] "TI 32-VFQFN (5x5)"
  rect 0.906x0.242 smd: 1(-2.503,1.75)
  rrect100% 0.906x0.242 smd: 2(-2.503,1.25) 3(-2.503,0.75) 4(-2.503,0.25) 5(-2.503,-0.25) 6(-2.503,-0.75) 7(-2.503,-1.25) 8(-2.503,-1.75) 17(2.503,-1.75) 18(2.503,-1.25) 19(2.503,-0.75) 20(2.503,-0.25) 21(2.503,0.25) 22(2.503,0.75) 23(2.503,1.25) 24(2.503,1.75)
  rrect100% 0.242x0.906 smd: 9(-1.75,-2.503) 10(-1.25,-2.503) 11(-0.75,-2.503) 12(-0.25,-2.503) 13(0.25,-2.503) 14(0.75,-2.503) 15(1.25,-2.503) 16(1.75,-2.503) 25(1.75,2.503) 26(1.25,2.503) 27(0.75,2.503) 28(0.25,2.503) 29(-0.25,2.503) 30(-0.75,2.503) 31(-1.25,2.503) 32(-1.75,2.503)
  rect 3.8x3.8 smd paste-2539.97: 33(0,0)
  silkscreen extent -3.15,-2.5 2.5,2.5, body extent -2.5,-2.5 2.5,2.5, height 1
VQFN_HR-12_3x2x1.0mm_P0.5mm [mm] "16-VQFN (3x3)"
  rrect40% 0.6x0.25 smd: 1(-0.9,1.125) 2(-0.9,0.475) 3(-0.9,-0.175) 4(-0.9,-0.675) 8(0.9,-0.675) 9(0.9,-0.175) 10(0.9,0.475) 11(0.9,1.125)
  rrect40% 0.25x0.6 smd: 5(-0.5,-1.4) 6(0,-1.4) 7(0.5,-1.4)
  rrect40% 0.25x1.825 smd: 12(0,0.788)
  silkscreen extent -1.35,-1.5 1,1.55, body extent -1,-1.5 1,1.5, height 1
VSON_HR-6_1.5x1.5x1.0mm_P0.5mm [mm] "TI SOT-23-5"
  rrect40% 0.6x0.25 smd: 1(-0.65,0.5) 2(-0.65,0) 3(-0.65,-0.5)
  rrect50% 1x0.2 smd: 4(0.45,-0.5) 5(0.45,0) 6(0.45,0.5)
  silkscreen extent -1.15,-0.8 0.7,0.85, body extent -0.75,-0.75 0.75,0.75, height 1

## Part data
C1 C7 C10 C13 C22 C23 C24 C25 C26 C27 C28 C29 C30 C31 C32 C33 C34 C35 C36 C37 C38 C39 C40 C41 C42 C43 C44 C47 C48 C49 C58 C59 C60 C62: library part CMP-001-00084-12, "Ceramic Capacitor, Multilayer, Ceramic, 50V, 10% +Tol, 10% -Tol, X7R, 15% TC, 0.1uF, Surface Mount, 0402", Capacitor Type=Ceramic, Case/Package=0402, Max Operating Temperature=125°C, Min Operating Temperature=-55°C, Package Shape=Rectangular, Temperature Coefficient=X7R, Tolerance=10%, Voltage Rating=50V, AECQ=Yes, Dielectric Material=Ceramic, Mounting Technology="Surface Mount", Multilayer=Yes, Packaging="Tape and Reel", Pins=2, Reach SVHC Compliant=Yes, RoHS Compliant=Yes, Terminal Finish=Nickel, Termination=Wraparound
  C7: PlaceNear=C7.2:U2.26:5mm
  C10: PlaceNear=C10.2:U2.15:5mm
  C13: PlaceNear=C13.2:U2.10:5mm
  C58: PlaceNear="C58.1:U2.9:5mm / C58.2:U2.11:5mm"
C2 C3 C46: library part CMP-001-00092-6, "Ceramic Capacitor, Multilayer, Ceramic, 50V, 20% +Tol, 20% -Tol, X5R, 15% TC, 10uF, Surface Mount, 1206", Capacitor Type=Ceramic, Case/Package=1206, Max Operating Temperature=85°C, Min Operating Temperature=-55°C, Package Shape=Rectangular, Temperature Characteristics Code=X5R, Tolerance=20%, Voltage Rating=50V, AECQ=No, Dielectric Material=Ceramic, JESD-609 Code=e3, Mounting Technology="Surface Mount", Multilayer=Yes, Packaging="Tape and Reel", Pins=2, Reach SVHC Compliant=Yes, RoHS Compliant=Yes, Temperature Coefficient=X5R, Terminal Finish=Nickel, Termination=Wraparound
C4 C5: library part CMP-001-00113-1, "50V 47nF X7R ±10% 0402 Multilayer Ceramic Capacitors MLCC - SMD/SMT ROHS", Capacitor Type=Ceramic, Case/Package=0402, Max Operating Temperature=125°C, Min Operating Temperature=-55°C, Tolerance=10%, Voltage Rating=50V, AECQ=No, Mounting Technology=SMD, Pins=2
C6 C9 C12 C63 C64: library part CMP-001-00108-2, "Multilayer Ceramic Capacitors MLCC - SMD/SMT 0402 10uF 6.3VDC 20% X6S AEC-Q200", Capacitor Type=Ceramic, Case/Package=0402, Max Operating Temperature=105°C, Min Operating Temperature=-55°C, Temperature Coefficient=X6S, Tolerance=20%, Voltage Rating=6.3V, AECQ=Yes, Mounting Technology="Surface Mount", Pins=2, RoHS Compliant=Yes
  C6: PlaceNear=C6.2:U2.26:5mm
  C9: PlaceNear=C9.2:U2.15:5mm
  C12: PlaceNear=C12.2:U2.10:5mm
C8 C11 C14 C16 C18 C20: library part CMP-001-00110-2, "Ceramic Capacitor, Multilayer, Ceramic, 100V, 10% +Tol, 10% -Tol, X7R, 15% TC, 0.0047uF, Surface Mount, 0402", Capacitor Type=Ceramic, Case/Package=0402, Max Operating Temperature=125°C, Min Operating Temperature=-55°C, Temperature Coefficient=X7R, Tolerance=10%, Voltage Rating=100V, AECQ=Yes, Mounting Technology=SMD, Pins=2, RoHS Compliant=Yes
  C8: PlaceNear=C8.2:U2.26:5mm
  C11: PlaceNear=C11.2:U2.15:5mm
  C14: PlaceNear=C14.2:U2.10:5mm
  C16: PlaceNear=C16.2:U2.25:5mm
  C18: PlaceNear=C18.2:U2.16:5mm
  C20: PlaceNear=C20.2:U2.11:5mm
C15 C17 C19 C21 C52 C54 C55 C56 C57: library part CMP-001-00104-2, "Cap Cer 1UF 20V X7T 0402", Capacitor Type=Ceramic, Case/Package=0402, Max Operating Temperature=125°C, Min Operating Temperature=-55°C, Temperature Coefficient=X7R, Tolerance=20%, Voltage Rating=10V, AECQ=Yes, Mounting Technology="Surface Mount", Pins=2, RoHS Compliant=Yes
  C15: PlaceNear=C15.2:U2.25:5mm
  C17: PlaceNear=C17.2:U2.16:5mm
  C19: PlaceNear=C19.2:U2.11:5mm
C45: library part CMP-001-00109-2, "Ceramic Capacitor, Multilayer, Ceramic, 25V, 5% +Tol, 5% -Tol, C0G, 30ppm/Cel TC, 0.000012uF, Surface Mount, 0402", Capacitor Type=Ceramic, Case/Package=0402, Max Operating Temperature=125°C, Min Operating Temperature=-55°C, Temperature Coefficient=C0G, Tolerance=5%, Voltage Rating=25V, AECQ=Yes, Mounting Technology="Surface Mount", Pins=2, RoHS Compliant=Yes
C50 C51: library part CMP-001-00095-2, "22 µF ±20% 10V Ceramic Capacitor X7T 0805 (2012 Metric)", Capacitor Type=Ceramic, Case/Package=0805, Max Operating Temperature=125°C, Min Operating Temperature=-55°C, Temperature Coefficient=X7T, Tolerance=20%, Voltage Rating=10V, AECQ=Yes, Mounting Technology=SMD, Pins=2
C53: library part CMP-001-00101-2, "Ceramic Capacitor, Multilayer, Ceramic, 100V, 10% +Tol, 10% -Tol, X7R, 15% TC, 0.001uF, Surface Mount, 0402", Capacitor Type=Ceramic, Case/Package=0402, Max Operating Temperature=125°C, Min Operating Temperature=-55°C, Temperature Coefficient=X7R, Tolerance=10%, Voltage Rating=100V, AECQ=Yes, Mounting Technology=SMD, Pins=2
C61: library part CMP-001-00085-5, "Ceramic Capacitor, Multilayer, Ceramic, 10V, 20% +Tol, 20% -Tol, X5R, 15% TC, 4.7uF, Surface Mount, 0402", Capacitor Type=Ceramic, Case/Package=0402, Max Operating Temperature=85°C, Min Operating Temperature=-55°C, Package Shape=Rectangular, Rated DC Voltage (URdc)=10V, Temperature Coefficient=X5R, Tolerance=0%, Tolerance  (fill in as +-)=20%, AECQ=Yes, Dielectric Material=Ceramic, Mounting Technology="Surface Mount", Multilayer=Yes, Packaging="Tape and Reel", Pins=2, Reach SVHC Compliant=Yes, RoHS Compliant=Yes, Termination=Wraparound, Tolerance (fill in as +-)=20%, Voltage Rating=10V
D1: library part CMP-007-00036-1, "Red 630nm LED Indication - Discrete 2.2V 0603 (1608 Metric)", Case/Package=0603, Colour=Red, Forward Voltage=2.2V, Pins=2
J1: library part CMP-002-00135-2, "RF / Coaxial Connector, MMCX Coaxial, Straight Jack, Surface Mount Vertical, 50 ohm", Case/Package="MMCX SMD", Manufacturer=Samtec, Manufacturer Series=MMCX, Max Current Rating=1.5A, Max Operating Temperature=125°C, Min Operating Temperature=-65°C, Voltage Rating=335V, Connector Type="MMCX, Socket", Gender=Female, Length=3.45mm, Mounting Technology="Surface Mount", Pins=2
J2: "CONN HEADER SMD R/A 4POS 1MM", Current Rating (Amps)=0.7A, Insulation Color=Natural, Manufacturer="JST Sales America Inc.", Material Flammability Rating="UL94 V-0", Operating Temperature="-25°C ~ 85°C", Supplier Part Number 1=455-1804-1-ND, Voltage Rating=50V, ComponentLink1Description=Datasheet, ComponentLink1URL=http://www.jst-mfg.com/product/pdf/eng/eSH.pdf, ComponentLink2Description="DigiKey Link", ComponentLink2URL=http://digikey.com/product-detail/en/jst-sales-america-inc/SM04B-SRSS-TB-LF-SN/455-1804-1-ND/926875, Connector Type=Header, Contact Finish - Mating=Tin, Contact Finish - Post=Tin, Contact Material="Copper Alloy", Contact Shape=Square, Contact Type="Male Pin", Fastening Type=Push-Pull, Features="Solder Retention", Insulation Height="0.114\" (2.90mm)", Insulation Material="Polyamide (PA), Nylon", LastUpdated="1/12/2020 11:41:52 PM", Lifecycle Status=Active, Minimum Order=1, Mounting Type="Surface Mount, Right Angle", Number of Positions=4, Number of Positions Loaded=All, Number of Rows=1, Packaging=TapeAndReel, Part Number=SM04B-SRSS-TB(LF)(SN), Part Status=Active, PartId=62, Pitch - Mating="0.039\" (1.00mm)", Price=0.26, Series=SR, Shrouding="Shrouded - 4 Wall", Style="Board to Cable/Wire", Supplier 1=DigiKey, Termination=Solder
L1 L2 L3 L7 L8 L9: library part CMP-006-00026-1, "Ferrite Beads Multi-Layer 1.5KOhm 25% 100MHz 500mA 500mOhm DCR 0603 T/R", Case/Package=0603, Current - Saturation=13.3A, Current Rating=400mA, Max Operating Temperature=125°C, Min Operating Temperature=-55°C, Tolerance=25%, AECQ=no, DCR=20.5m, Height=800µm, Pins=2, Shileded=Yes
L4: library part CMP-006-00025-2, "IND 10UH 20% 3.1A SHD", Case/Package=0806, Current - Saturation=3.3A, Current Rating=450mA, Max Operating Temperature=105°C, Min Operating Temperature=-40°C, Self Resonant Frequency=35MHz, Tolerance=10%, AECQ=No, DCR=0.52, Height=1.6mm, Pins=2, Shileded=Yes
L5: library part CMP-006-00022-5, "General Purpose Inductor, 4.7uH, 20%, 1 Element, Metal Alloy-Core, SMD, 1210", Case/Package=1210, Current Rating=2A, Max Operating Temperature=125°C, Min Operating Temperature=-40°C, Tolerance=20%, AECQ=Yes, ComponentLink2Description=https://www.bourns.com/docs/Product-Datasheets/SRP4021HMCT.pdf, DCR=98m, Pins=2
L6: library part CMP-006-00028-1, "Inductor Power Shielded Multi-Layer 0.47uH 20% 1MHz Ferrite 1.1A 0.19Ohm DCR 0603 T/R", Case/Package=0603, Current - Saturation=1.8A, Current Rating=1.1A, Max Operating Temperature=125°C, Min Operating Temperature=-55°C, Self Resonant Frequency=180MHz, Tolerance=20%, AECQ=No, DCR=98m, Height=800µm, Mounting Technology=SMT, Pins=2, Shileded=Yes
MP1: library part CMP-00015-2, "M12 camera lens holder - 20mm spacing"
R1: library part CMP-009-00241-1, "Fixed Resistor, Metal Glaze/Thick Film, 0.063W, 4020ohm, 50V, 1% +/-Tol, Surface Mount, 0402", Case/Package=0402, Manufacturer Part Number=Blank, Max Operating Temperature=155°C, Min Operating Temperature=-55°C, Power=62.5mW, Tolerance=1%, Voltage Rating=50V, AECQ=Yes, Mounting Technology=SMD, Pins=2
R2: library part CMP-009-00240-1, "RES, 0402, 49.9 ohm, 1%, 0.1W, AUTO", Case/Package=0402, Max Operating Temperature=155°C, Min Operating Temperature=-55°C, Power=62.5mW, Tolerance=1%, Voltage Rating=50V, AECQ=Yes, Manufacturer Part Number=RMCA0402FT49R9-HP, Mounting Technology=SMD, Pins=2
R3 R4 R5: library part CMP-009-00226-1, "Res Thick Film 0402 1.5K Ohm 5% 0.063W ±100ppm/°C Molded SMD Paper T/R", Case/Package=0402, Max Operating Temperature=155°C, Min Operating Temperature=-55°C, Power=62.5mW, Tolerance=5%, AECQ=Yes, Mounting Technology="Surface Mount", Pins=2, RoHS Compliant=Yes
R6 R7 R8 R11 R12 R18: library part CMP-009-00242-1, "Fixed Resistor, Thin Film, 0.1W, 10000ohm, 50V, 1% +/-Tol, 100ppm/Cel, Surface Mount, 0402", Case/Package=0402, Manufacturer Part Number=Blank, Max Operating Temperature=155°C, Min Operating Temperature=-55°C, Power=100mW, Tolerance=1%, Voltage Rating=50V, AECQ=Yes, Mounting Technology=SMD, Pins=2
R9 R10: library part CMP-009-00198-3, "Fixed Resistor, Metal Glaze/thick Film, 0.0625W, 36000ohm, 50V, 1% +/-Tol, 100ppm/Cel, Surface Mount, 0402", Case/Package=0402, Max Operating Temperature=155°C, Min Operating Temperature=-55°C, Power=62.5mW, Tolerance=1%, AECQ=Yes, Mounting Technology=SMD, Pins=2